# Altium PCB I2C_board_PCB1.pcbdoc
Units mil, origin at the board's own origin, x right, y up, seen from the top; angles counter-clockwise.
Board outline 3349.48 x 2061.68 mil, 2 copper layers (Top Layer, Bottom Layer); 24 components, 21 nets, 91 pads, 20 vias.
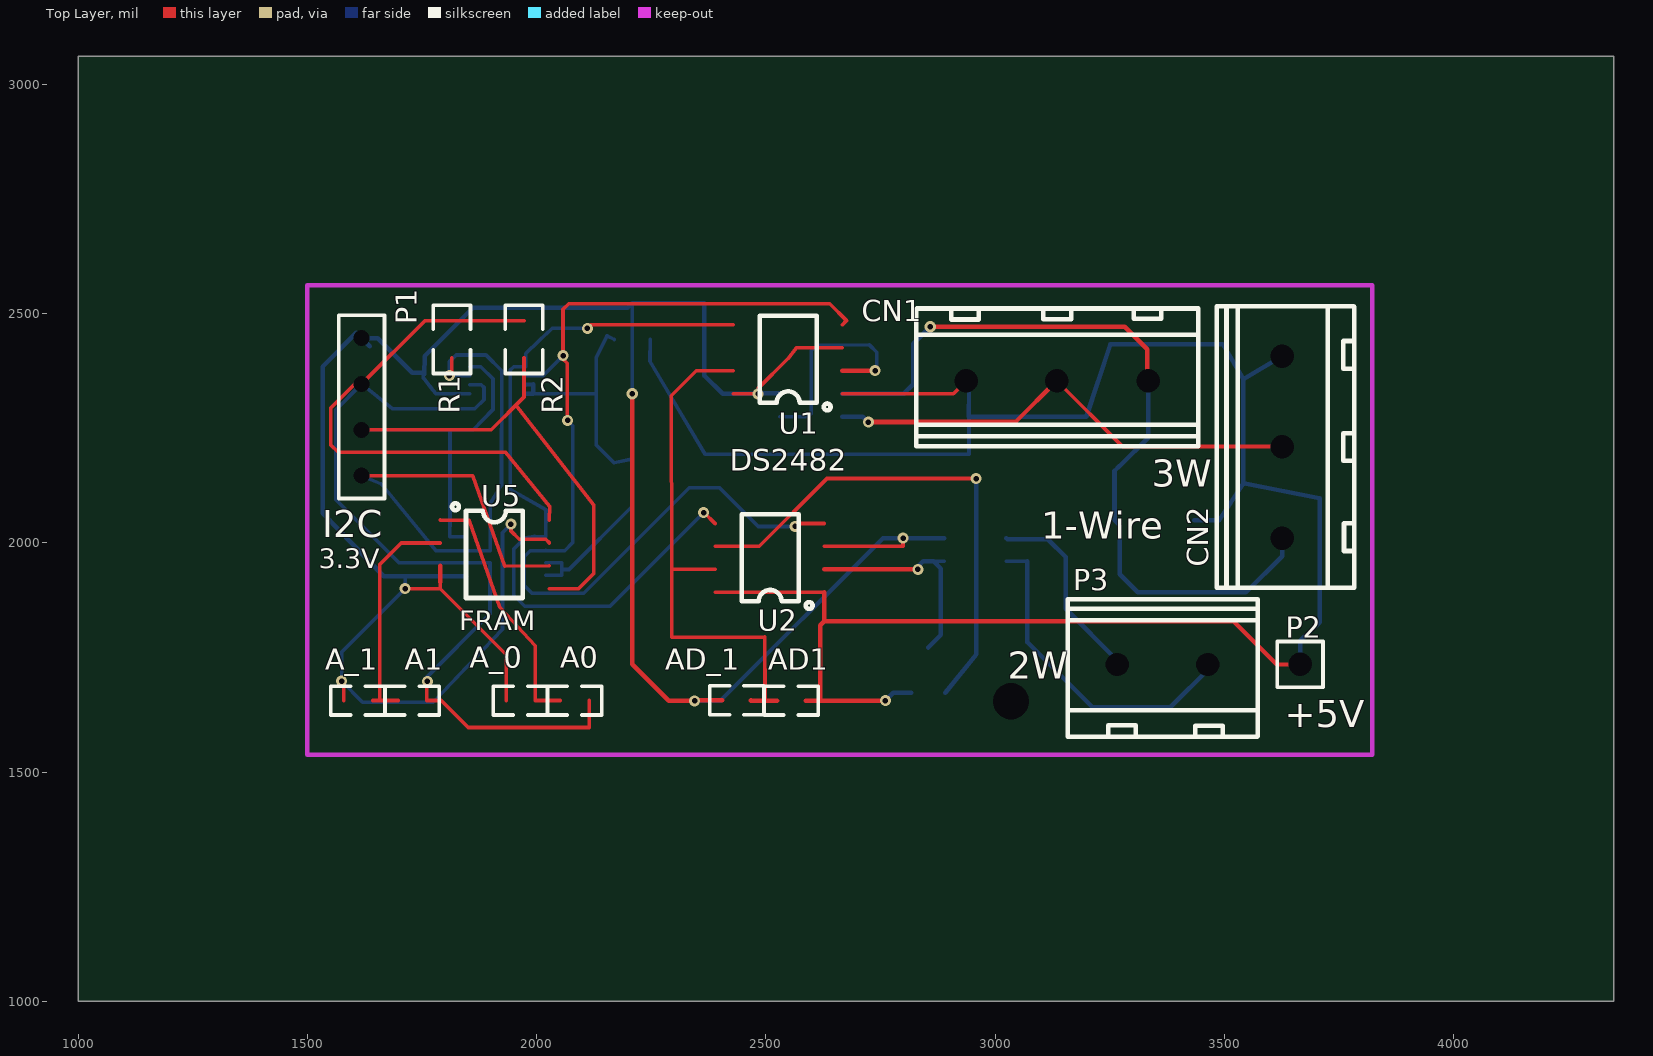
[diagram p0: Top Layer view]
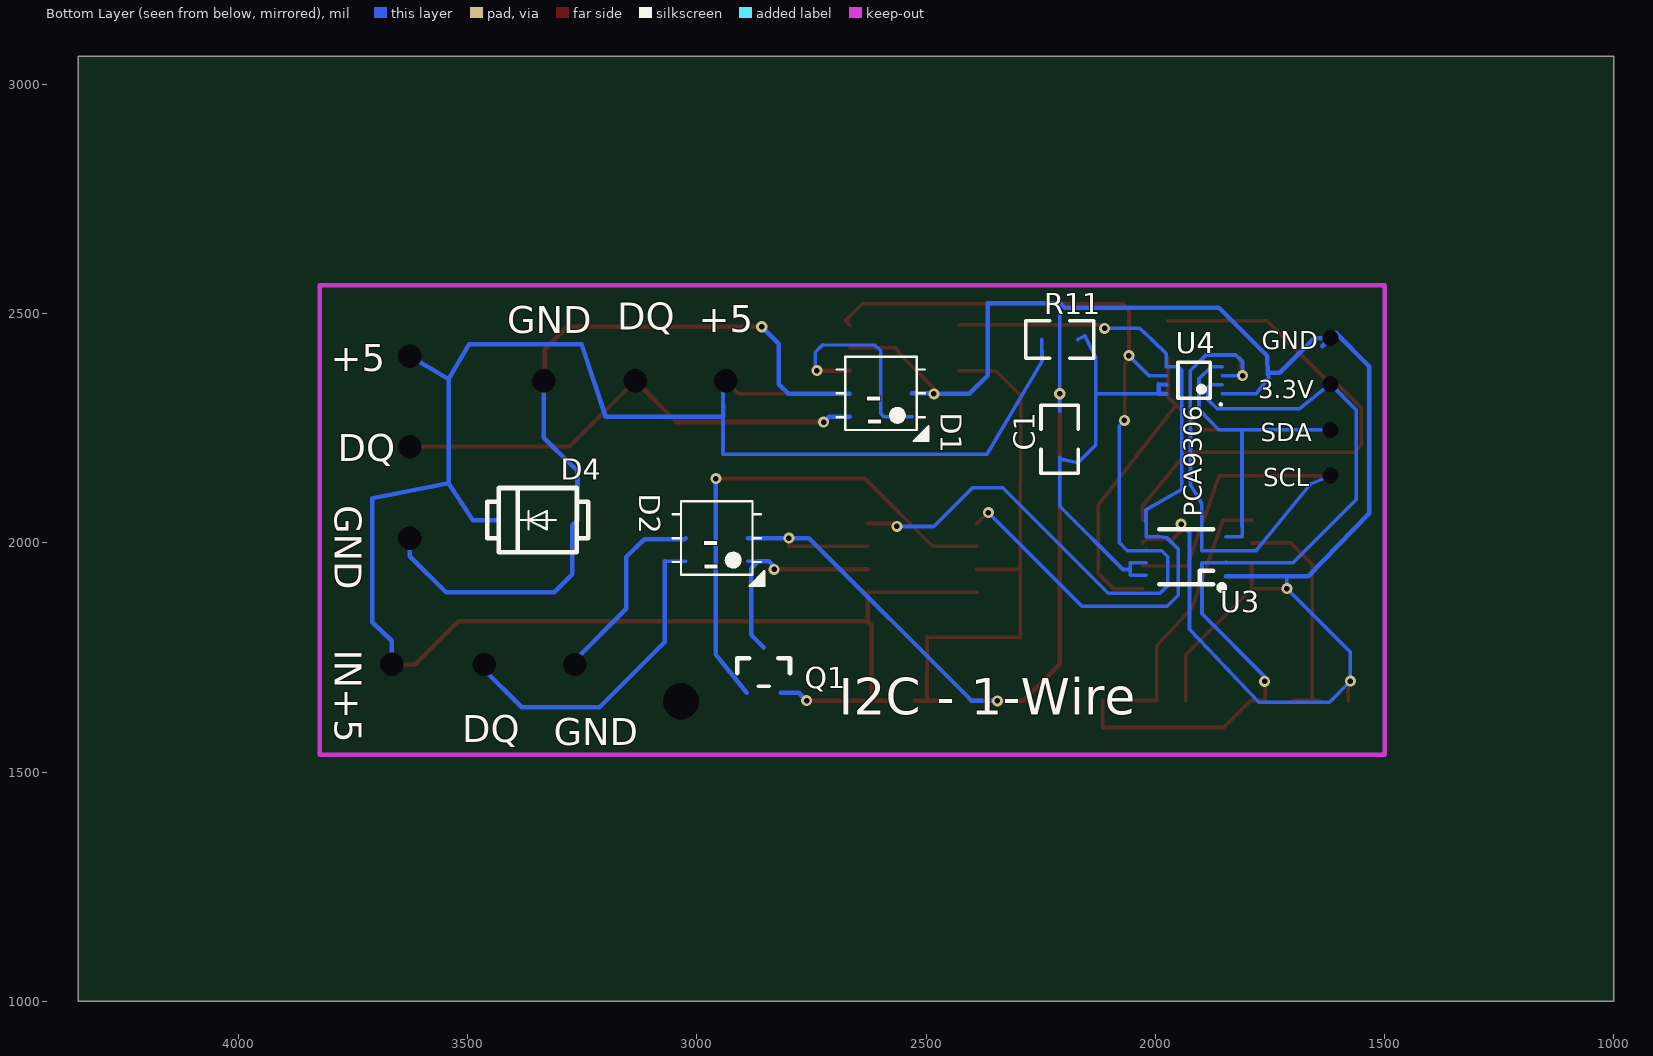
[diagram p1: Bottom Layer view, seen from below]

## Layer stack, top to bottom
Top Layer: signal copper (thickness not stored)
Dielectric: dielectric 12.6, FR-4, Dk 4.8
Bottom Layer: signal copper (thickness not stored)

## Board outline
4349.48,1000 1000,1000 1000,3061.68 4349.48,3061.68

## Components (designator, comment, footprint, x,y, rotation, side; value= is the part's Value field where it differs from the comment)
A0 "0603" 0603 2051.08,1656.27 r0 top
A1 "0603" 0603 1696.83,1656.21 r0 top
A_0 "0603" 0603 1932.99,1656.29 r0 top
A_1 "0603" 0603 1578.69,1656.29 r0 top
AD1 "0603" 0603 2523.6,1656.21 r0 top
AD_1 "0603" 0603 2468.08,1656.6 r180 top
C1 "0805" 0805#1 2208.56,2186.58 r270 bottom
CN1 "WJ301V-5.00-3P" WJ301V-5.00-3P 3137.3,2353.88 r0 top
CN2 "WJ301V-5.00-3P" WJ301V-5.00-3P 3625.9,2207.48 r270 top
D1 "TSOC-6" TSOC-6 2598.7,2326.38 r270 bottom
D2 "TSOC-6" TSOC-6 2956.7,2010.58 r270 bottom
D4 "SMB(DO-214AA)" SMB(DO-214AA) 3350.4,2049.88 r180 bottom
P1 "HDR-4X1/2.54" HDR-4X1/2.54 1618.1,2246.78 r90 top
P2 "HDR-1X1/2.54" HDR-1X1/2.54 3665.25,1735.01 r0 top
P3 "WJ301V-5.00-2P" WJ301V-5.00-2P 3363.8,1717.98 r180 top
Q1 "SOT-23(SOT-23-3)" SOT-23(SOT-23-3) 2854.31,1772.75 r0 bottom
R1 "0805" 0805#2 1814.86,2404.3 r90 top
R2 "0805" 0805#2 1972.34,2404.3 r90 top
R11 "0805" 0805#1 2247.93,2443.67 r0 bottom
U1 "SOIC-8_150MIL" SOIC-8_150MIL 2641.6,2325.58 r180 top
U2 "SOIC-8_150MIL" SOIC-8_150MIL 2602.26,1892.49 r180 top
U3 "TSSOP8_3 THIN PAD" "TSSOP8_3 THIN PAD" 1933,1969.78 r270 bottom
U4 "VSSOP-8_2X2.3X05P" VSSOP-8_2X2.3X05P 1854.23,2325.56 r180 bottom
U5 "SOIC-8_150MIL" SOIC-8_150MIL 1814.86,2049.97 r0 top

## Footprints (in the part's own frame and the unit in brackets; to place one, negate y for a bottom-side part, rotate by r counter-clockwise, add the part's x,y. Pads: shape width x height; smd on the part's side, far side on the other; paste and mask are expansions set on the pad)
0603 [mil]
  round 0 smd: 1(0.62,0.01) 2(63.62,0.01)
  silkscreen extent -28,-32 91,32
0805#1 [mil]
  round 0 smd: 1(0,-0.04) 2(-80,-0.04)
  silkscreen extent -114,-41 35,41
0805#2 [mil]
  round 0 smd: 1(-0.02,-0.04) 2(79.98,-0.04)
  silkscreen extent -35,-41 114,41
HDR-1X1/2.54 [mm]
  round 0 hole 1.3: 1(0.001,-0.001)
  silkscreen extent -1.27,-1.27 1.27,1.27
HDR-4X1/2.54 [mil]
  round 0 hole 35: 1(-100,0) 2(0,0) 3(100,0) 4(200,0)
  silkscreen extent -150,-50 250,50
SMB(DO-214AA) [mil]
  round 0 smd: 1(90,0) 2(-84,0)
  silkscreen extent -107,-70 113,70
SOIC-8_150MIL [mil]
  round 0 smd: 1(-25,0) 2(-25,-50) 3(-25,-100) 4(-25,-150) 5(213,-150) 6(213,-100) 7(213,-50) 8(213,0)
  silkscreen extent 0,-170 155,36
SOT-23(SOT-23-3) [mil]
  round 0 smd: 1(37.39,99.17) 2(-37.41,99.17) 3(-0.01,0.77)
  silkscreen extent -57,24 57,85
TSOC-6 [mil]
  round 0 smd: 1(50.8,68) 2(0,68) 3(-50.8,68) 4(-50.8,-68) 5(0,-68) 6(50.8,-68)
  silkscreen extent -80,-96 104,104
"TSSOP8_3 THIN PAD" [mil]
  round 0 smd: 1(40.6,87) 2(13,87) 3(-13,87) 4(-40.6,87) 5(-41.3,-87) 6(-13,-87) 7(13,-87) 8(41.3,-87)
  silkscreen extent -60,-59 73,84
VSSOP-8_2X2.3X05P [mil]
  round 0 smd: 1(0.03,0.02) 2(0.03,19.72) 3(0.03,39.32) 4(0.03,59.02) 5(-122.07,59.02) 6(-122.07,39.32) 7(-122.07,19.72) 8(-122.07,0.02)
  silkscreen extent -96,-24 -3,69
WJ301V-5.00-2P [mm]
  round 0 hole 1.3: 1(-2.54,-0.429) 2(2.469,-0.429)
  silkscreen extent -5.31,-4.05 5.22,3.58
WJ301V-5.00-3P [mm]
  round 0 hole 1.3: 1(-5.08,0) 2(-0.071,0) 3(5.001,0)
  silkscreen extent -7.85,-3.62 7.76,4.01

## Free pads (board coordinates)
  round 0 hole 78.74 unplated: ""(3034.7,1654.58)

## Via types
v1: diameter 24.02, hole 12.01, Top Layer to Bottom Layer, 12 vias
v2: diameter 24.4, hole 12, Top Layer to Bottom Layer, 8 vias

## Nets (pads, with @x,y where several pads share a name; then routed paths per layer and width w, separated by ;. In a path a pad name is that pad's centre, name@x,y a point inside that pad or via, vN(x,y) a via of type N, cw(c..) or ccw(c..) an arc to the next point about the centre after c; other vN are vias at no path point)
$BoardOutlineNet: 
CN1_2: CN1.2 CN2.2 D1.6 | length 1060.9
  Top Layer w8: CN1.2 3278.1,2210.28 CN2.2
  Top Layer w10: v2(2723.5,2263.78) 3044.4,2263.78 CN1.2
  Bottom Layer w10: D1.6 2711.7,2275.58 v2(2723.5,2263.78)
CN1_3: CN1.3 CN2.3 D1.5 D4.1 | length 1767.5
  Top Layer w9.84: v2(2858.6,2471.58) 3283.01,2471.58 3332.18,2422.41 3332.18,2355.9 CN1.3
  Bottom Layer w9.84: 2666.6,2325.58 2800.29,2325.55 2821.16,2346.43 2821.16,2434.14 v2(2858.6,2471.58)
  Bottom Layer w10: CN1.3 3333.75,2353.43 3333.75,2229.5 3272.33,2168.08 3271.55,2168.08 3260.4,2156.93 D4.1 3271.55,2038.73 3271.55,1931.86 3310.92,1892.49 3547.14,1892.49 3625.9,1971.25 CN2.3
GND: A_0.1 A_1.1 AD_1.2 C1.2 D1.2 D2.2 P1.4 U1.3 U1.8 U2.3 U3.1 U4.1 U5.3 U5.4 U5.7 | length 6001.8
  Top Layer w8: v1(1574.6,1698.48) 1579.3,1693.78 1579.3,1656.18 ; v1(1713,1900.28) 1789.8,1900.33 1789.8,1914.08 1789.8,1899.98 1933.6,1756.18 1933.6,1656.18 ; v1(1944,2040.88) 1944,2025.98 1962.1,2007.88 2019.9,2007.88 2027.8,1999.98 ; U1.8 v2(2483,2325.18) ; v2(2483,2325.18) 2483,2336.98 2547.9,2401.88 2566.4,2425.56 U1.3 ; 2627.2,1992.58 2799.12,1992.58 v1(2799.1,2010.58)
  Top Layer w9.84: 1789.8,1914.08 1789.8,1949.98
  Top Layer w10: v2(2208.7,2325.58) 2208.6,1734.98 2288.1,1655.48 v2(2344.4,1655.48) 2344.39,1656.6 AD_1.2
  Bottom Layer w7.87: 2208.1,2522.38 2208.7,2521.78 v2(2208.7,2325.58)
  Bottom Layer w8: P1.4 1635.6,2429.28 ; 1726.06,1927.14 1713.29,1927.53 v1(1713,1900.28) 1574.6,1761.94 v1(1574.6,1698.48) 1620.3,1652.68 1774.3,1652.68 1925.49,1811.9 1925.49,2022.41 v1(1944,2040.88) ; 1752.66,2369.65 1752.9,2359.78 1768.8,2340.08 1780.6,2325.58 U4.1 ; 2208.6,2287.38 2208.7,2287.38 v2(2208.7,2325.58)
  Bottom Layer w9.84: P1.4 1653.1,2446.78 1729,2370.88 1749.3,2370.78 1752.66,2369.65 ; 1635.6,2429.28 1606.6,2458.28 1533,2384.58 1533,2064.68 1666.44,1927.14 1726.06,1927.14 1845.96,1927.14 ; 1754.6,2367.48 1755.4,2407.08 1861.8,2513.38 2199.1,2513.38 ; 2205.9,2521.78 2206.9,2521.78 2199.1,2513.38 ; v2(2483,2325.18) 2405.79,2325.18 2366.04,2364.93 2366.04,2522.41 2208.13,2522.41 2199.1,2513.38 ; v1(2799.1,2010.58) v1(2799.1,2010.58) 2834.7,2010.58 D2.2
  Bottom Layer w10: v2(2344.4,1655.48) 2401.02,1656.21 2755.39,2010.58 v1(2799.1,2010.58) ; v2(2483,2325.18) 2483,2326.33 2530.72,2326.33
P3_1: D2.6 P3.1 | length 725.2
  Bottom Layer w8: D2.6 3070.6,1959.78
  Bottom Layer w9.84: 3070.6,1959.78 3070.6,1783.27 3212.48,1641.31 3382.18,1641.31 3469.78,1728.9 P3.1
P3_2: D2.5 P3.2 | length 427.3
  Bottom Layer w10: D2.5 3027.04,2008.24 3114.86,2008.24 3153.83,1969.27 3153.83,1856.27 3266.6,1743.5 P3.2
S$67: 
S$69: 
U1_1: AD1.2 CN1.1 CN2.1 D4.2 P2.1 Q1.2 R11.1 U1.1 U2.1 U2.8 | length 4939
  Top Layer w8: 2389.2,1892.58 2627.2,1892.58 ; AD1.2 2618.8,1656.18 ; U1.1 2909,2325.58 CN1.1 ; 3614,1734.98 P2.1
  Top Layer w9.84: AD1.2 AD1.2 v2(2760.6,1656.18) ; 2618.8,1656.18 2618.8,1820.68 2627.2,1829.18 ; 2627.2,1892.58 2627.2,1829.18 ; 3614,1734.98 3519.9,1829.18 2627.2,1829.18
  Bottom Layer w8: 2248,2443.58 2247.14,2396.03 2367.61,2193.28 2943,2193.48 2943,2301.28 2943,2348.18 CN1.1
  Bottom Layer w9.84: v2(2760.6,1656.18) 2777.94,1673.52 2816.9,1673.52 ; 2943,2301.28 2943,2274.78 3198.72,2274.77 3251.47,2433.83 3496.5,2433.88 3542.02,2357.45 ; D4.2 3488.8,2049.88 3541.63,2130.28 ; 3541.23,2127.53 3541.6,2357.88 ; 3542.02,2357.84 CN2.1 ; 3542.42,2130.28 3707.77,2097.21 3708.16,1826.74 3665.3,1786.28 P2.1
U1_2: D1.1 U1.2 | length 475.6
  Top Layer w10: U1.2 2737.7,2375.58 v2(2738.1,2375.98)
  Bottom Layer w7.87: D1.1 2592.4,2275.58 2599.1,2282.28 2599.1,2418.88 2611.71,2431.47 2725.8,2431.88 2742,2415.68 2742,2379.88 v2(2738.1,2375.98)
U1_4: U1.4 U2.4 U3.6 U4.6 | length 2247.7
  Top Layer w7.87: v1@2057.42,2408.78 2057.42,2400.71 2066.9,2391.78 2066.43,2268.11 v2(2067.3,2267.18)
  Top Layer w8: v1@2057.42,2408.52 2057.42,2509.6 2069.8,2521.98 2639.3,2521.58 2676,2484.98 U1.4 ; v1(2563.8,2035.88) 2570.5,2042.58 2627.2,2042.58
  Bottom Layer w7.87: U4.6 2013.8,2364.88 v1(2057.5,2408.58) ; 2020,1984.18 2020,1983.04 2061.31,1983.04 2079.03,2000.76 2079.03,2255.51 v2(2067.3,2267.18)
  Bottom Layer w8: 2020,1984.18 2020,1983.04 1986.12,1983.04 1973.13,1970.05 1973.13,1906.91 1989.72,1890.52 2102.58,1890.52 2332.61,2120.44 2398.72,2120.44 2483.28,2035.88 v1(2563.8,2035.88)
U1_5: U1.5 U2.5 U3.5 U4.5 | length 1676.4
  Top Layer w8: v1(2110.4,2468.08) 2118,2475.58 U1.5 ; v1(2364.1,2066.08) 2365.67,2066.11 2389.2,2042.58
  Bottom Layer w8: 1995.17,2014.14 2020,2013.18 2020.37,2072.41 1942.42,2116.39 1942.42,2377.1 1949.9,2384.58 U4.5 1976.27,2412.93 2004.7,2440.18 2033.76,2468.08 v1(2110.4,2468.08) ; 1995.2,2014.18 1974.31,2010.99 1950.29,1986.97 1950.29,1885.74 1973.92,1862.18 2160.1,1862.18 v1(2364.1,2066.08)
U1_7: AD1.1 AD_1.1 U1.7 U2.7 | length 1256.5
  Top Layer w8: 2389.2,1942.58 2371.9,1942.58 ; U1.7 2348.35,2375.58 2293.84,2321.07 2294.78,1942.58 2371.9,1942.58 ; 2494.4,1656.28 2498,1657.88 2497.54,1794.85 2294.8,1794.58 2294.8,1942.88 2371.9,1942.58
  Top Layer w10: AD_1.1 2467.47,1656.18 AD1.1
U2_2: D2.1 Q1.3 U2.2 | length 477.9
  Top Layer w9.84: 2627.2,1942.58 v1(2831.4,1942.58)
  Bottom Layer w8: 2865.8,1959.78 D2.1
  Bottom Layer w9.84: v1(2831.4,1942.58) 2831.4,1948.38 2842.8,1959.78 2865.8,1959.78 2881.8,1943.78 2881.8,1799.42 2854.3,1771.92
U2_6: Q1.1 U2.6 | length 1121.2
  Top Layer w8: 2389.2,1992.58 2485.5,1992.58 2633.44,2140.52 v1(2958.6,2140.48)
  Bottom Layer w9.84: 2891.7,1673.48 Q1.1 2958.6,1756.68 v1(2958.6,2140.48)
U3_2: A0.2 A1.2 P1.3 R1.2 R2.2 U3.2 U4.2 U5.8 | length 2980
  Top Layer w8: v1(1761.8,1697.78) 1760.4,1696.38 A1.2 1792,1656.18 1850.57,1597.61 2114.72,1597.61 2114.72,1656.24 ; R2.2 R1.2 1755.7,2484.28 P1.3 1610.7,2354.18 1551.1,2294.48 1551.1,2213.78 1567.2,2197.58 1932,2197.58 2028.25,2079.5 2027.8,2049.98
  Bottom Layer w8: v1(1761.8,1697.78) 1756.3,1703.28 1898.3,1845.28 1898.32,1956.66 U3.2 ; 1846,1958.18 1846,1957.06 1699.51,1957.06 1562.1,2094.47 1562.1,2290.78 P1.3 1686.51,2292.49 1865.25,2292.49 1885.3,2312.18 1885.3,2338.98 1879.1,2345.18 1854.2,2345.18
U3_3: P1.1 R1.1 U3.3 U4.3 U5.6 | length 1562
  Top Layer w8: P1.1 1860.92,2146.82 1930.21,1949.18 2027.8,1949.98 ; v1@1809.48,2364.91 1814.9,2370.33 R1.1
  Bottom Layer w8: P1.1 1661,2128.58 1780.3,1982.68 1811.1,1982.68 U3.3 ; v1(1809.4,2364.88) U4.3 1853.9,2364.88 ; v1@1814.5,2362.78 1814.5,2364.91 1809.48,2364.91 1809.73,2395.5 1824.49,2409.78 1889.3,2409.78 1923.9,2375.78 1923.4,2126.18 1898.9,2086.18 1899.1,1982.78 1845.9,1982.78
U3_4: P1.2 R2.1 U3.4 U4.4 U5.5 | length 1795.6
  Top Layer w8: P1.2 1900.8,2246.78 ; R2.1 1972.4,2318.38 1900.8,2246.78 ; 2027.8,1899.98 2091.2,1899.98 2124.3,1933.08 2124.3,2082.98 1955.02,2300.36 1900.8,2246.78
  Bottom Layer w8: P1.2 1849.9,2246.78 ; 1810.53,2014.93 1811.1,2053.78 1810.9,2246.78 ; 1811.1,2013.18 1846,2013.18 ; 1836.6,2246.78 1861.91,2246.78 1904.62,2291.03 1904.62,2358.25 1878.29,2384.58 U4.4
U3_7: C1.1 R11.2 U3.7 U3.8 U4.7 U4.8 | length 984.9
  Bottom Layer w8: U4.8 2129.82,2325.56 ; 2020,1929.18 2054.8,1929.18 2055.02,1956.66 U3.7 ; 2055.02,1942.1 2070.8,1942.18 2208.7,2080.08 2208.6,2180.58 ; 2169.2,2443.68 2153.4,2451.58 2129.8,2404.28 2129.8,2213.68 2168.8,2174.88 2208.56,2183.1 ; C1.1 2208.7,2186.58 2208.7,2172.68
  Bottom Layer w9.84: U4.8 1992.03,2325.17 1992.03,2337.76 1992.03,2345.64 U4.7
U5_1: A0.1 A_0.2 U5.1 | length 552.3
  Top Layer w8: U5.1 1853.05,2048.79 1919.6,1859.78 1996.8,1775.58 A_0.2 ; 1996.6,1656.18 2051.72,1656.18 2051.72,1656.24
U5_2: A1.1 A_1.2 U5.2 | length 543.8
  Top Layer w8: 1642.3,1656.18 1697.5,1656.18 1657.4,1656.18 1657.4,1952.68 1704.6,1999.98 1789.8,1999.98
pads on no net: D1.3 D1.4 D2.3 D2.4 U1.6

## Silkscreen, mask and mechanical layers (free items; w line width, h text height)
Top Overlay:
  text "DS2482" at 2421.5,2157.66 h47.24
  text "3W" at 3341.6,2122.45 h59.05
  text "I2C" at 1532.7,2012.65 h59.05
  text "1-Wire" at 3100.7,2009.15 h59.05
  text "3.3V" at 1524.7,1944.83 h43.31
  text "FRAM" at 1831.4,1809.83 h43.31
  text "2W" at 3027.4,1703.56 h59.05
  text "+5V" at 3631.3,1598.45 h59.05
Bottom Overlay:
  text "DQ" at 3174.2,2464.66 h59.05
  text "+5" at 2996,2459.05 h59.05
  text "GND" at 3414,2457.86 h59.05
  text "GND" at 1768.2,2423 h39.37
  text "+5" at 3798.8,2374.86 h59.05
  text "3.3V" at 1775.5,2315.9 h39.37
  text "-" at 2633.7,2285.58 h80
  text "-" at 2632.1,2235.28 h80
  text "SDA" at 1770.4,2222.2 h39.37
  text "DQ" at 3783.3,2177.95 h59.05
  text "SCL" at 1764.6,2123.8 h39.37
  text "GND" at 3790.43,2081.88 h59.05 r90
  text "PCA9306" at 1898.71,2056.68 h39.37 r270
  text "-" at 2989.8,1969.38 h80
  text "-" at 2988.4,1919.08 h80
  text "IN+5" at 3790.43,1766.88 h59.05 r90
  text "I2C - 1-Wire" at 2690.3,1624.88 h80
  text "DQ" at 3511.5,1565.76 h59.05
  text "GND" at 3312.6,1559.06 h59.05